# EAGLE board vm_mini_main3a (EAGLE 6.4), part 1 of 2
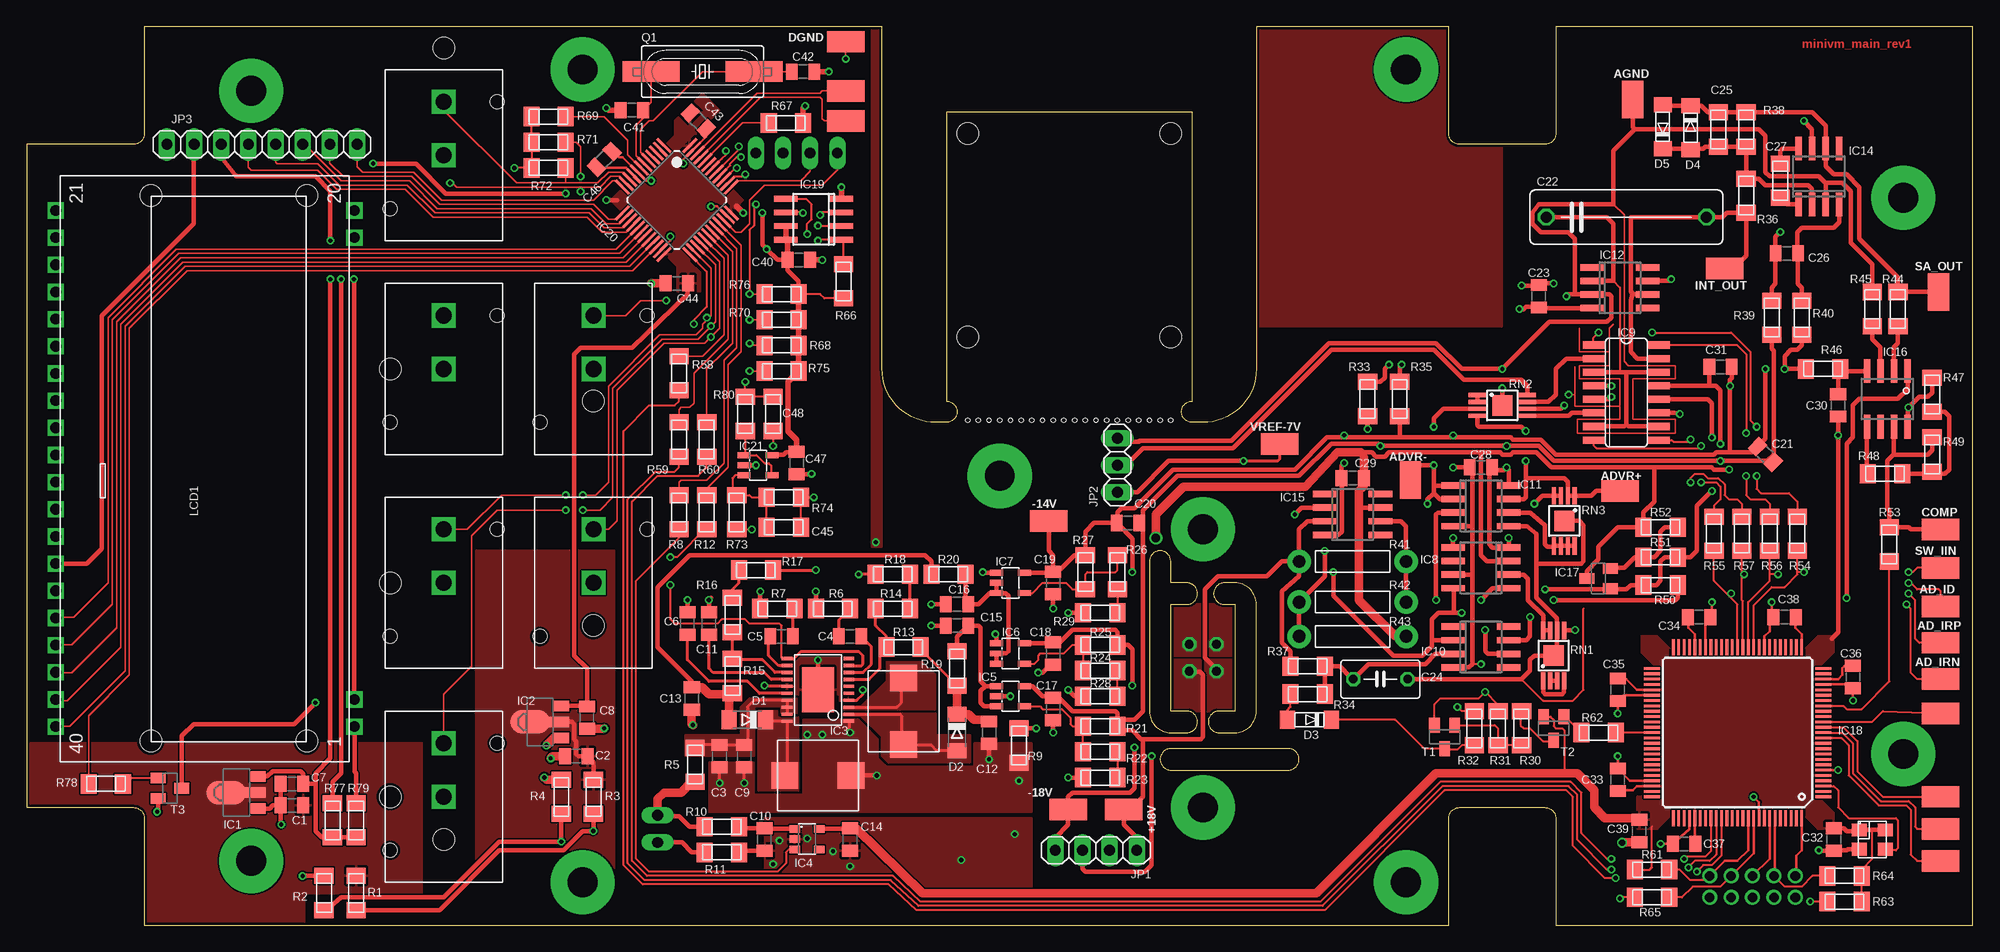
[diagram p0: board, top side]
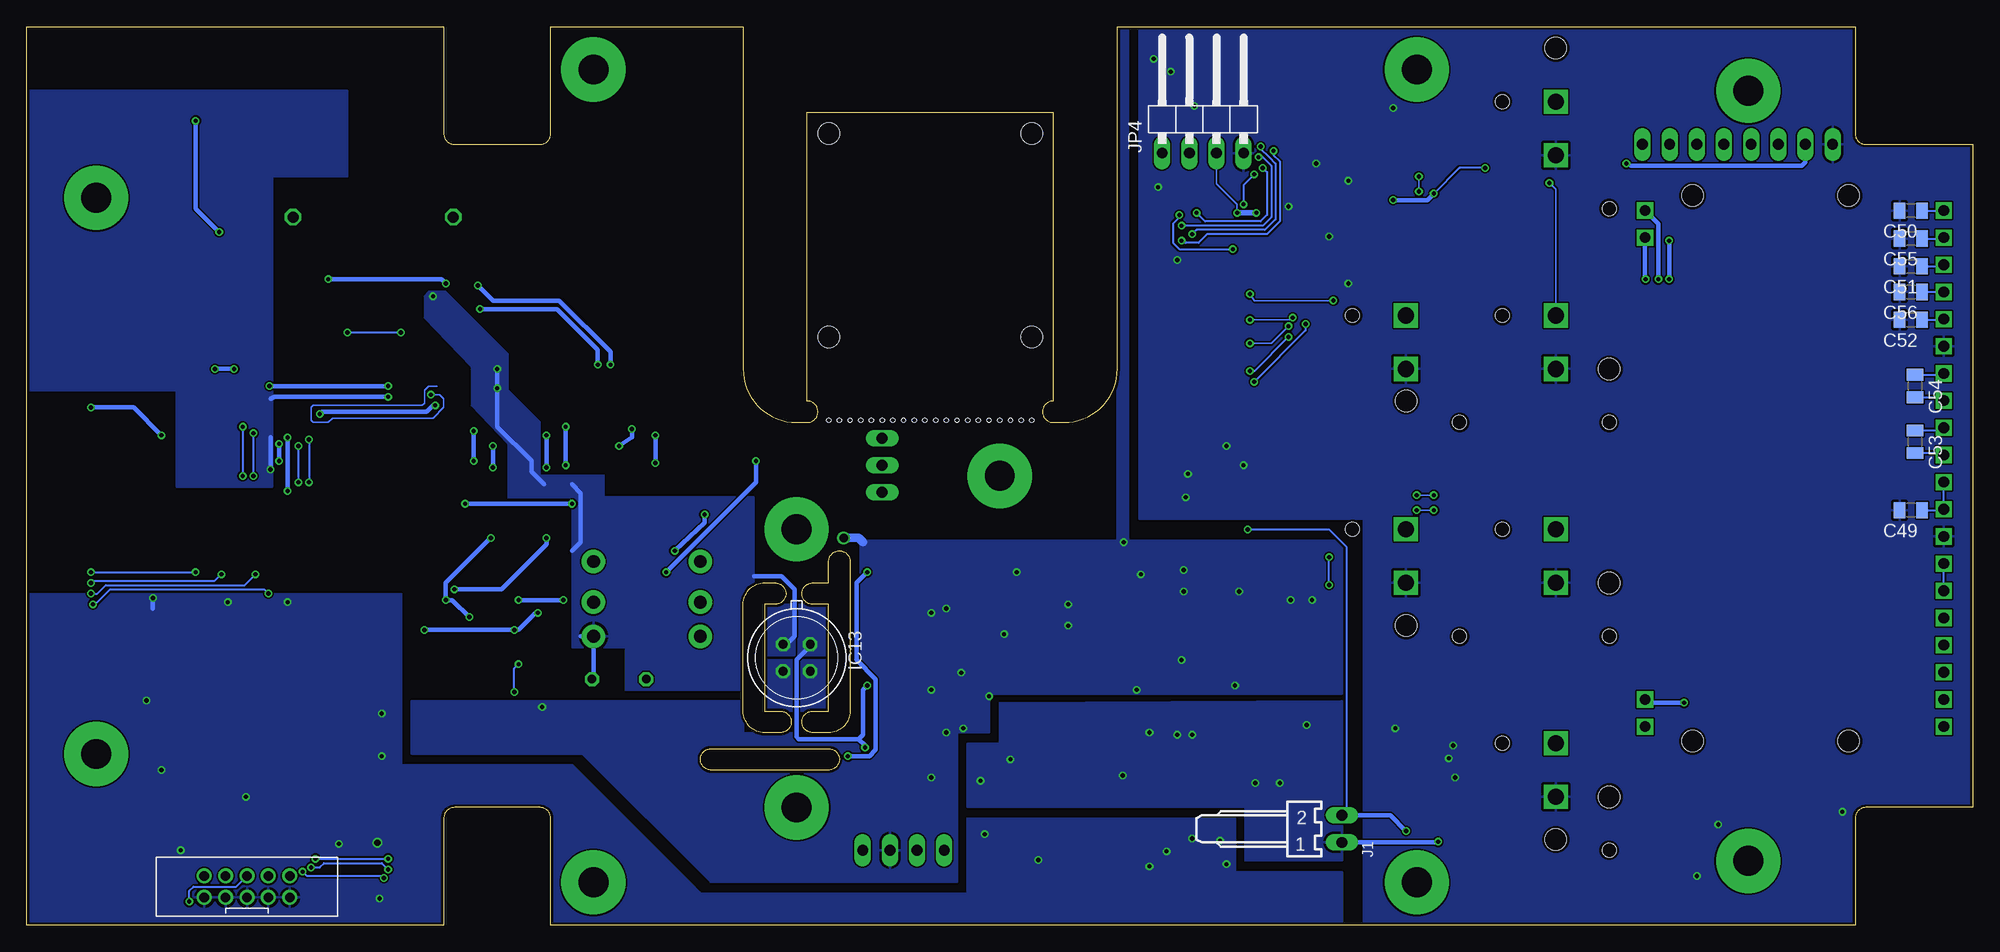
[diagram p1: board, bottom side, seen from below]

Size 182 x 84 mm. Coordinates in mm from the lower left corner, seen from the top.
Outline: 0,11 10,11 arc-90 11,10 11,0 133,0 133,10 arc-90 134,11 142,11 arc-90 143,10 143,0 182,0 182,84 143,84 143,74 arc-90 142,73 134,73 arc-90 133,74 133,84 115,84 115,52 arc-90 110,47 109,47 arc-90 108,48 arc-90 109,49 109,76 86,76 86,49 arc-90 87,48 arc-90 86,47 85,47 arc-90 80,52 80,84 11,84 11,74 arc-90 10,73 0,73 0,11
Outline: 105,34 105,20 arc90 107,18 108.5,18 arc90 109.5,19 arc90 108.5,20 107,20 107,30 108.5,30 arc90 109.5,31 arc90 108.5,32 107,32 107,34 arc90 106,35 arc90 105,34
Outline: 111.5,20 arc90 110.5,19 arc90 111.5,18 113,18 arc90 115,20 115,30 arc90 113,32 112,32 arc90 111,31 arc90 112,30 113,30 113,20 111.5,20
Outline: 107,16.5 arc90 106,15.5 arc90 107,14.5 118,14.5 arc90 119,15.5 arc90 118,16.5 107,16.5
Copper layers (1*16): Top 0.035mm / dielectric 1.5mm / Bottom 0.035mm
Design rules "Fusion_eagle_rule_v1.1": minimum track width 6mil, minimum drill 0.3mm, track to track 6mil, track to pad 6mil, pad to pad 6mil, via to via 6mil, smd to smd 0mil, copper to edge 10mil, drill to drill 10mil, minimum pad ring 10mil, minimum via ring 6mil, stop-mask expansion 2mil, vias tented up to drill 100mil, thermal gap 10mil
Holes 2 mm at 11.6,17.2 26.2,17.2 26.2,68.2 11.6,68.2 39,8 39,82 53,28 53,49 34,52 34,32 34,12 88,74 88,55 107,55 107,74
Holes 0.4 mm at 88,47.2 107,47.2 89,47.2 90,47.2 91,47.2 92,47.2 93,47.2 94,47.2 95,47.2 96,47.2 97,47.2 98,47.2 100,47.2 99,47.2 101,47.2 102,47.2 103,47.2 104,47.2 105,47.2 106,47.2

## Footprints (pad centres in the part's own frame; a part is rotated, then mirrored left to right if it is on the bottom)
R0805 = smd 1.1 x 1.5: 1 -1.05,0; 2 1.05,0
C150-054X183 = drill 1.016 octagon: 1 -7.493,0; 2 7.493,0
C050-035X075 = drill 0.813 octagon: 1 -2.54,0; 2 2.54,0
R_MINIMELF = smd 1.5 x 1.8: P$1 -1.6,0; P$2 1.6,0
IDC_20_10P = drill 0.9: 1 -4,1; 2 -4,-1; 3 -2,1; 4 -2,-1; 5 0,1; 6 0,-1; 7 2,1; 8 2,-1; 9 4,1; 10 4,-1
MINIMELF = smd 1.4 x 1.8: A 1.7,0; C -1.7,0
SOD-80 = smd 1.397 x 1.702: A 1.905,0; K -2.223,0
SOT89 = smd 1 x 1.5: 1 -1.499,-1.981; 3 1.499,-1.981 | smd 1 x 2: 2 0,-1.727 | smd 2.2 x 3.7: 2@1 0,0.94
TSSOP20-EP = smd 0.305 x 0.991: 1 -2.925,-2.9; 2 -2.275,-2.9; 3 -1.625,-2.9; 4 -0.975,-2.9; 5 -0.325,-2.9; 6 0.325,-2.9; 7 0.975,-2.9; 8 1.625,-2.9; 9 2.275,-2.9; 10 2.925,-2.9 | smd 0.3 x 1: 11 2.925,2.9; 12 2.275,2.9; 13 1.625,2.9; 14 0.975,2.9; 15 0.325,2.9; 16 -0.325,2.9; 17 -0.975,2.9; 18 -1.625,2.9; 19 -2.275,2.9; 20 -2.925,2.9 | smd 4.2 x 3: EP 0,0
SOT23-5 = smd 0.7 x 1: 1 -0.99,-1.17; 2 -0.04,-1.17; 3 0.91,-1.17; 4 0.91,1.13; 5 -0.99,1.13
SOT23-5L = smd 0.55 x 1.2: 1 -0.95,-1.3; 2 0,-1.3; 3 0.95,-1.3; 4 0.95,1.3; 5 -0.95,1.3
SO08 = smd 0.6 x 2.2: 1 -1.905,-2.6; 2 -0.635,-2.6; 3 0.635,-2.6; 4 1.905,-2.6; 5 1.905,2.6; 6 0.635,2.6; 7 -0.635,2.6; 8 -1.905,2.6
SO16 = smd 0.66 x 2.032: 1 -4.445,-3.073; 2 -3.175,-3.073; 3 -1.905,-3.073; 4 -0.635,-3.073; 5 0.635,-3.073; 6 1.905,-3.073; 7 3.175,-3.073; 8 4.445,-3.073; 9 4.445,3.073; 10 3.175,3.073; 11 1.905,3.073; 12 0.635,3.073; 13 -0.635,3.073; 14 -1.905,3.073; 15 -3.175,3.073; 16 -4.445,3.073
TO39/4 = drill 0.813 octagon: 1 -1.27,-1.27; 2 1.27,-1.27; 3 1.27,1.27; 4 -1.27,1.27
SOT23 = smd 1 x 1.4: 1 -0.95,-1.1; 2 0.95,-1.1; 3 0,1.1
TQFP100 = smd 1.5 x 0.25: 1 -8,6; 2 -8,5.5; 3 -8,5; 4 -8,4.5; 5 -8,4; 6 -8,3.5; 7 -8,3; 8 -8,2.5; 9 -8,2; 10 -8,1.5; 11 -8,1; 12 -8,0.5; 13 -8,0; 14 -8,-0.5; 15 -8,-1; 16 -8,-1.5; 17 -8,-2; 18 -8,-2.5; 19 -8,-3; 20 -8,-3.5; 21 -8,-4; 22 -8,-4.5; 23 -8,-5; 24 -8,-5.5; 25 -8,-6; 51 8,-6; 52 8,-5.5; 53 8,-5; 54 8,-4.5; 55 8,-4; 56 8,-3.5; 57 8,-3; 58 8,-2.5; 59 8,-2; 60 8,-1.5; 61 8,-1; 62 8,-0.5; 63 8,0; 64 8,0.5; 65 8,1; 66 8,1.5; 67 8,2; 68 8,2.5; 69 8,3; 70 8,3.5; 71 8,4; 72 8,4.5; 73 8,5; 74 8,5.5; 75 8,6 | smd 0.25 x 1.5: 26 -6,-8; 27 -5.5,-8; 28 -5,-8; 29 -4.5,-8; 30 -4,-8; 31 -3.5,-8; 32 -3,-8; 33 -2.5,-8; 34 -2,-8; 35 -1.5,-8; 36 -1,-8; 37 -0.5,-8; 38 0,-8; 39 0.5,-8; 40 1,-8; 41 1.5,-8; 42 2,-8; 43 2.5,-8; 44 3,-8; 45 3.5,-8; 46 4,-8; 47 4.5,-8; 48 5,-8; 49 5.5,-8; 50 6,-8; 76 6,8; 77 5.5,8; 78 5,8; 79 4.5,8; 80 4,8; 81 3.5,8; 82 3,8; 83 2.5,8; 84 2,8; 85 1.5,8; 86 1,8; 87 0.5,8; 88 0,8; 89 -0.5,8; 90 -1,8; 91 -1.5,8; 92 -2,8; 93 -2.5,8; 94 -3,8; 95 -3.5,8; 96 -4,8; 97 -4.5,8; 98 -5,8; 99 -5.5,8; 100 -6,8
SO-08 = smd 0.55 x 2.2: 1 -1.905,-2.6; 2 -0.635,-2.6; 3 0.635,-2.6; 4 1.905,-2.6; 5 1.905,2.6; 6 0.635,2.6; 7 -0.635,2.6; 8 -1.905,2.6
LQFP48 = smd 1.8 x 0.25: 1 -4.45,2.75; 2 -4.45,2.25; 3 -4.45,1.75; 4 -4.45,1.25; 5 -4.45,0.75; 6 -4.45,0.25; 7 -4.45,-0.25; 8 -4.45,-0.75; 9 -4.45,-1.25; 10 -4.45,-1.75; 11 -4.45,-2.25; 12 -4.45,-2.75; 25 4.45,-2.75; 26 4.45,-2.25; 27 4.45,-1.75; 28 4.45,-1.25; 29 4.45,-0.75; 30 4.45,-0.25; 31 4.45,0.25; 32 4.45,0.75; 33 4.45,1.25; 34 4.45,1.75; 35 4.45,2.25; 36 4.45,2.75 | smd 0.25 x 1.8: 13 -2.75,-4.45; 14 -2.25,-4.45; 15 -1.75,-4.45; 16 -1.25,-4.45; 17 -0.75,-4.45; 18 -0.25,-4.45; 19 0.25,-4.45; 20 0.75,-4.45; 21 1.25,-4.45; 22 1.75,-4.45; 23 2.25,-4.45; 24 2.75,-4.45; 37 2.75,4.45; 38 2.25,4.45; 39 1.75,4.45; 40 1.25,4.45; 41 0.75,4.45; 42 0.25,4.45; 43 -0.25,4.45; 44 -0.75,4.45; 45 -1.25,4.45; 46 -1.75,4.45; 47 -2.25,4.45; 48 -2.75,4.45
7395-02 = drill 1.016 long: 1 1.27,0; 2 -1.27,0
1X04 = drill 1.016 long: 1 -3.81,0; 2 -1.27,0; 3 1.27,0; 4 3.81,0
1X03 = drill 1.016 long: 1 -2.54,0; 2 0,0; 3 2.54,0
1X08 = drill 1.016 long: 1 -8.89,0; 2 -6.35,0; 3 -3.81,0; 4 -1.27,0; 5 1.27,0; 6 3.81,0; 7 6.35,0; 8 8.89,0
1X04/90 = drill 1.016 long: 1 -3.81,-3.81; 2 -1.27,-3.81; 3 1.27,-3.81; 4 3.81,-3.81
SWITCH_6450 = drill 1.5 square: P$1 0,0; P$2 5,0 | hole 1.3: 5,-5; -5,5
BOURNS_SRP7030 = smd 2.5 x 2.5: P$1 3.1,0; P$2 -3.1,0
EADOGM = drill 1 square: 1 -23.44,-13.65; 2 -20.9,-13.65; 19 22.28,-13.65; 20 24.82,-13.65; 21 24.82,14.29; 22 22.28,14.29; 23 19.74,14.29; 24 17.2,14.29; 25 14.66,14.29; 26 12.12,14.29; 27 9.58,14.29; 28 7.04,14.29; 29 4.5,14.29; 30 1.96,14.29; 31 -0.58,14.29; 32 -3.12,14.29; 33 -5.66,14.29; 34 -8.2,14.29; 35 -10.74,14.29; 36 -13.28,14.29; 37 -15.82,14.29; 38 -18.36,14.29; 39 -20.9,14.29; 40 -23.44,14.29
OSC_3225 = smd 1.2 x 1.4: 1 -0.9,-1.2; 2 0.9,-1.2; 3 0.9,1.2; 4 -0.9,1.2
HC49UP = smd 5.334 x 1.93: 1 -4.826,0; 2 4.826,0
R_TR191 = drill 1.2 pad 2.2: P$1 5,0; P$2 -5,0
MSOP8-EP = smd 0.4 x 1.6: 1 -0.975,-2.35; 2 -0.325,-2.35; 3 0.325,-2.35; 4 0.975,-2.35; 5 0.975,2.35; 6 0.325,2.35; 7 -0.325,2.35; 8 -0.975,2.35 | smd 1.9 x 1.9: EP 0,0
TP_SMD_35X2 = smd 3.5 x 2: P$1 0,0

## Placement (x,y rotation side)
C1  1u  [R0805]  24.8,11.2 0 top
C2  1u  [R0805]  51.4,15.8 0 top
C3  100n  [R0805]  64.8,15.8 270 top
C4  47n  [R0805]  77,27 0 top
C5  68n  [R0805]  70.6,27 180 top
C6  1u  [R0805]  61.8,28.2 270 top
C7  1u  [R0805]  24.8,13.2 0 top
C8  1u  [R0805]  52.4,19.4 90 top
C9  100n  [R0805]  67.1,15.8 270 top
C10  1u  [R0805]  69,8 90 top
C11  100n  [R0805]  63.8,28.2 270 top
C12  10u  [R0805]  90,18 270 top
C13  10u  [R0805]  62.2,21.2 90 top
C14  1u  [R0805]  77,8 90 top
C15  1u  [R0805]  87,28 180 top
C16  1u  [R0805]  87,30 180 top
C17  1u  [R0805]  96,20.2 270 top
C18  1u  [R0805]  96,25.4 90 top
C19  1u  [R0805]  96,32 90 top
C20  1u  [R0805]  103,37.6 180 top
C21  1u  [R0805]  162.6,44 135 top
C22  2n2  [C150-054X183]  149.6,66.2 0 top
C23  100n  [R0805]  141.4,58.8 90 top
C24  100n  [C050-035X075]  126.6,23 0 top
C25  33p  [R_MINIMELF]  158.2,74.4 90 top
C26  100n  [R0805]  164.6,62.8 180 top
C27  DNP  [R_MINIMELF]  164,69.6 270 top
C28  100n  [R0805]  136,42.8 0 top
C29  100n  [R0805]  124,41.8 0 top
C30  100n  [R0805]  169.4,48.6 90 top
C31  100n  [R0805]  158.4,52.2 180 top
C32  100n  [R0805]  169,8 90 top
C33  100n  [R0805]  148.8,13.6 270 top
C34  100n  [R0805]  156.4,28.8 180 top
C35  100n  [R0805]  148.8,22 90 top
C36  100n  [R0805]  170.8,23.2 90 top
C37  100n  [R0805]  155,7.6 0 top
C38  100n  [R0805]  164.4,28.8 0 top
C39  10u  [R0805]  150.8,8.8 90 top
C40  100n  [R0805]  72.2,62.2 0 top
C41  33p  [R0805]  56.6,76.2 180 top
C42  33p  [R0805]  72.6,79.8 0 top
C43  100n  [R0805]  62.8,75.2 315 top
C44  100n  [R0805]  60.8,60 180 top
C45  1n8  [R_MINIMELF]  70.8,37.2 0 top
C46  100n  [R0805]  54,71.6 45 top
C47  100n  [R0805]  72,43.2 270 top
C48  1n8  [R_MINIMELF]  69.8,47.8 270 top
C49  1u  [R0805]  5.8,38.8 180 bottom
C50  1u  [R0805]  5.8,66.8 180 bottom
C51  1u  [R0805]  5.8,61.6 180 bottom
C52  1u  [R0805]  5.8,56.6 180 bottom
C53  1u  [R0805]  5.4,45.2 270 bottom
C54  1u  [R0805]  5.4,50.4 270 bottom
C55  1u  [R0805]  5.8,64.2 180 bottom
C56  1u  [R0805]  5.8,59.2 180 bottom
CON1  IDC_10_2MM  [IDC_20_10P]  161.4,3.6 0 bottom
D1  [MINIMELF]  67.4,19.2 180 top
D2  [MINIMELF]  87,18 270 top
D3  BAV103  [SOD-80]  119.8,19.2 180 top
D4  BAV103  [SOD-80]  155.6,74.4 270 top
D5  BAV103  [SOD-80]  153,74.8 90 top
IC1  MCP1703-50\  [SOT89]  19.6,12.4 90 top
IC2  MCP1703-33  [SOT89]  48,19 90 top
IC3  ADP5070  [TSSOP20-EP]  74,22 90 top
IC4  NJM2866F33  [SOT23-5]  73,8 270 top
IC5  ADP7142  [SOT23-5L]  92,21.4 270 top
IC6  ADP7182  [SOT23-5L]  92,25.4 270 top
IC7  ADP7182  [SOT23-5L]  92,32 270 top
IC8  DG419DJD  [SO08]  136,33.4 90 top
IC9  DG211B  [SO16]  149.6,49.8 270 top
IC10  OPA177  [SO08]  136,26 270 top
IC11  OPA2192  [SO08]  136,39.2 270 top
IC12  OPA140  [SO08]  149,59.6 270 top
IC13  LM399H  [TO39/4]  110,25 270 bottom
IC14  OPA192  [SO08]  167.6,70 0 top
IC15  OPA177  [SO08]  124,38.4 270 top
IC16  LM311D  [SO08]  174,49.2 180 top
IC17  TL431_SOT23  [SOT23]  147,32.4 90 top
IC18  MACHXO2-1200-TQ100T100  [TQFP100]  160,18 180 top
IC19  FLASH_SPI  [SO-08]  73.6,66 90 top
IC20  STM32L152XC_LQFP48  [LQFP48]  60.8,67.8 315 top
IC21  MCP6441  [SOT23-5L]  68.4,43 270 top
J1  22-05-7028-02  [7395-02]  59,9 270 bottom
JP1  [1X04]  100,7 180 top
JP2  [1X03]  102,43 90 top
JP3  [1X08]  22,73 180 top
JP4  [1X04/90]  72,76 0 bottom
K1  SWITCH_MINI6450  [SWITCH_6450]  39,12 90 top
K2  SWITCH_MINI6450  [SWITCH_6450]  39,32 90 top
K3  SWITCH_MINI6450  [SWITCH_6450]  39,52 90 top
K4  SWITCH_MINI6450  [SWITCH_6450]  39,72 90 top
K5  SWITCH_MINI6450  [SWITCH_6450]  53,32 90 top
K6  SWITCH_MINI6450  [SWITCH_6450]  53,52 90 top
L1  INDUCTORBOURNS_SRP7030  [BOURNS_SRP7030]  74,14 0 top
L2  INDUCTORBOURNS_SRP7030  [BOURNS_SRP7030]  82,20 90 top
LCD1  EADOGM132-5  [EADOGM]  17,42 90 top
OSC1  OSC3225  [OSC_3225]  172.6,8 270 top
Q1  [HC49UP]  63.2,79.8 0 top
R1  1R8  [R_MINIMELF]  30.8,3 270 top
R2  0R  [R_MINIMELF]  27.8,3 270 top
R3  1R8  [R_MINIMELF]  53,12 270 top
R4  0R  [R_MINIMELF]  50,12 270 top
R5  1R8  [R_MINIMELF]  62.5,15 270 top
R6  12k  [R_MINIMELF]  75.4,29.6 180 top
R7  12k  [R_MINIMELF]  70.2,29.6 180 top
R8  3k9  [R_MINIMELF]  63.6,38.6 90 top
R9  0R  [R_MINIMELF]  92.8,16.8 270 top
R10  1R8  [R_MINIMELF]  65,9.2 180 top
R11  0R  [R_MINIMELF]  65,6.8 180 top
R12  12k  [R_MINIMELF]  61,38.6 270 top
R13  2M4  [R_MINIMELF]  82,26 180 top
R14  62k  [R_MINIMELF]  81,29.6 0 top
R15  2M4  [R_MINIMELF]  66,23.3 270 top
R16  120k  [R_MINIMELF]  66,29 270 top
R17  93k  [R_MINIMELF]  68.2,33.2 180 top
R18  39k  [R_MINIMELF]  81,32.8 180 top
R19  10R  [R_MINIMELF]  87,24 270 top
R20  10R  [R_MINIMELF]  86.2,32.8 180 top
R21  620k  [R_MINIMELF]  100.4,18.6 0 top
R22  39k  [R_MINIMELF]  100.4,16.2 0 top
R23  6k2  [R_MINIMELF]  100.4,13.8 180 top
R24  39k  [R_MINIMELF]  100.4,23.8 0 top
R25  620k  [R_MINIMELF]  100.4,26.2 0 top
R26  47k  [R_MINIMELF]  102,33 270 top
R27  620k  [R_MINIMELF]  99,33 90 top
R28  6k2  [R_MINIMELF]  100.4,21.4 180 top
R29  12k  [R_MINIMELF]  100.4,29.2 180 top
R30  120k  [R_MINIMELF]  139.8,18.4 90 top
R31  620k  [R_MINIMELF]  137.6,18.4 270 top
R32  120k  [R_MINIMELF]  135.4,18.4 90 top
R33  10R  [R_MINIMELF]  125.4,49.2 270 top
R34  12k  [R_MINIMELF]  119.8,21.6 180 top
R35  10R  [R_MINIMELF]  128.4,49.2 270 top
R36  12k  [R_MINIMELF]  160.8,68.2 90 top
R37  62R  [R_MINIMELF]  119.8,24.2 0 top
R38  62k  [R_MINIMELF]  160.8,74.4 90 top
R39  10R  [R_MINIMELF]  163.2,56.8 270 top
R40  10R  [R_MINIMELF]  166,56.8 270 top
R41  3k01  [R_TR191]  124,34 0 top
R42  3k01  [R_TR191]  124,30.2 0 top
R43  6k95  [R_TR191]  124,27 0 top
R44  3k9  [R_MINIMELF]  175,57.6 270 top
R45  620R  [R_MINIMELF]  172.6,57.6 90 top
R46  10R  [R_MINIMELF]  168,52 180 top
R47  62R  [R_MINIMELF]  178.2,49.6 90 top
R48  39k  [R_MINIMELF]  173.8,42.2 0 top
R49  3k9  [R_MINIMELF]  178.2,44 270 top
R50  62k  [R_MINIMELF]  152.8,31.8 180 top
R51  620k  [R_MINIMELF]  152.8,34.4 180 top
R52  240k  [R_MINIMELF]  152.8,37.2 0 top
R53  6k2  [R_MINIMELF]  174.2,35.6 270 top
R54  6k2  [R_MINIMELF]  165.6,36.6 270 top
R55  6k2  [R_MINIMELF]  157.8,36.6 270 top
R56  6k2  [R_MINIMELF]  163,36.6 270 top
R57  6k2  [R_MINIMELF]  160.4,36.6 270 top
R58  6k2  [R_MINIMELF]  61,51.6 90 top
R59  6k2  [R_MINIMELF]  61,45.4 90 top
R60  6k2  [R_MINIMELF]  63.6,45.4 90 top
R61  6k2  [R_MINIMELF]  152,5.2 0 top
R62  6k2  [R_MINIMELF]  147,18 0 top
R63  6k2  [R_MINIMELF]  170,2.2 180 top
R64  6k2  [R_MINIMELF]  170,4.6 180 top
R65  6k2  [R_MINIMELF]  152,2.6 180 top
R66  39k  [R_MINIMELF]  76.4,60.2 90 top
R67  6k2  [R_MINIMELF]  71,75 0 top
R68  6k2  [R_MINIMELF]  70.6,54.2 0 top
R69  6k2  [R_MINIMELF]  48.8,75.6 180 top
R70  6k2  [R_MINIMELF]  70.6,56.6 0 top
R71  6k2  [R_MINIMELF]  48.8,73.2 180 top
R72  6k2  [R_MINIMELF]  48.8,70.8 180 top
R73  6M2  [R_MINIMELF]  66.4,38.6 90 top
R74  2M4  [R_MINIMELF]  70.8,40 0 top
R75  6k2  [R_MINIMELF]  70.6,51.8 0 top
R76  6k2  [R_MINIMELF]  70.6,59 0 top
R77  390R  [R_MINIMELF]  28.6,9.8 270 top
R78  6k2  [R_MINIMELF]  7.4,13.2 180 top
R79  390R  [R_MINIMELF]  30.8,9.8 270 top
R80  620R  [R_MINIMELF]  67.2,47.8 90 top
RN1  LT5400-5k-1k  [MSOP8-EP]  142.8,25.2 0 top
RN2  LT5400-100k-100k  [MSOP8-EP]  138,48.6 270 top
RN3  LT5400-10k+10k  [MSOP8-EP]  143.8,37.8 180 top
T1  BC847  [SOT23]  132.6,17.6 180 top
T2  BC857  [SOT23]  142.8,18.4 180 top
T3  BC847  [SOT23]  13.4,12.8 270 top
TP1  TEST_PADSMD_35X2  [TP_SMD_35X2]  95.6,37.8 0 top
TP2  TEST_PADSMD_35X2  [TP_SMD_35X2]  97.4,10.8 180 top
TP3  TEST_PADSMD_35X2  [TP_SMD_35X2]  102.6,10.8 0 top
TP4  TEST_PADSMD_35X2  [TP_SMD_35X2]  150.2,77.2 90 top
TP5  TEST_PADSMD_35X2  [TP_SMD_35X2]  158.8,61.4 0 top
TP6  TEST_PADSMD_35X2  [TP_SMD_35X2]  178.8,59.2 90 top
TP7  TEST_PADSMD_35X2  [TP_SMD_35X2]  179,37 0 top
TP8  TEST_PADSMD_35X2  [TP_SMD_35X2]  149,40.6 0 top
TP9  TEST_PADSMD_35X2  [TP_SMD_35X2]  129.4,41.6 90 top
TP10  TEST_PADSMD_35X2  [TP_SMD_35X2]  179,33.4 0 top
TP11  TEST_PADSMD_35X2  [TP_SMD_35X2]  179,26.4 0 top
TP12  TEST_PADSMD_35X2  [TP_SMD_35X2]  179,23 0 top
TP13  TEST_PADSMD_35X2  [TP_SMD_35X2]  179,29.8 0 top
TP14  TEST_PADSMD_35X2  [TP_SMD_35X2]  179,6 180 top
TP15  TEST_PADSMD_35X2  [TP_SMD_35X2]  179,9 180 top
TP16  TEST_PADSMD_35X2  [TP_SMD_35X2]  179,12 0 top
TP17  TEST_PADSMD_35X2  [TP_SMD_35X2]  179,19.8 180 top
TP18  TEST_PADSMD_35X2  [TP_SMD_35X2]  76.6,75.2 0 top
TP19  TEST_PADSMD_35X2  [TP_SMD_35X2]  76.6,78 0 top
TP20  TEST_PADSMD_35X2  [TP_SMD_35X2]  76.6,82.6 0 top
TP21  TEST_PADSMD_35X2  [TP_SMD_35X2]  117.2,45 0 top

## Library data of the parts
C1-C21 C23 C25-C56 IC4 K1-K6 R1-R80 = _moja
C22 C24 = _rcl
CON1 OSC1 = _mcs1a
D1 D2 = diode
D3-D5 IC1-IC3 IC5-IC7 IC17 IC19 IC21 LCD1 RN1-RN3 T1-T3 = _mcom6
IC8-IC12 IC14 IC15 = linear
IC13 IC16 = _linear
IC18 IC20 = _jl4
J1 = con-molex; OC_FARNELL: 9731601; OC_NEWARK: unknown
JP1-JP4 = pinhead-2
L1 L2 = _mcs1
Q1 = crystal
TP1-TP21 = _moja_e

## Nets
0V: C3.2 C9.2 C12.2 C13.1 IC3.1 J1.1 L1.P$1 R2.P$2 R4.P$2 R9.P$2 R11.P$2
+3V3: C14.2 C30.1 C32.2 C33.2 C34.2 C35.2 C36.2 C37.2 C38.2 C39.2 CON1.1 IC4.5 IC16.8 IC18.5 IC18.11 IC18.23 IC18.26 IC18.46 IC18.50 IC18.55 IC18.73 IC18.80 IC18.93 IC18.100 OSC1.1 OSC1.4 R47.P$2 R61.P$1 R63.P$1 R64.P$1 T2.2
+5V: C7.2 IC1.3 JP3.6 R77.P$2 R79.P$2
+18V: C17.1 C20.1 C21.1 C28.2 C31.2 IC5.5 IC8.4 IC9.13 IC10.7 IC11.8 IC13.3 JP1.1 R21.P$2 R33.P$2 R39.P$2 R50.P$1 TP3.P$1
+UB: J1.2 R1.P$2 R3.P$2 R5.P$2 R10.P$2 R73.P$1
-14V: C19.2 C20.2 C21.2 C28.1 C29.1 C31.1 IC7.5 IC8.7 IC9.4 IC10.4 IC11.4 IC15.4 JP1.3 R27.P$2 R31.P$1 R35.P$2 R40.P$2 R46.P$2 T1.2 TP1.P$1
-18V: C18.2 IC6.5 IC13.4 JP1.4 R25.P$2 TP2.P$1
AD_C1: IC20.29 R58.P$2
AD_C2: IC20.30 R59.P$2
AD_C3: IC20.31 R60.P$2
AD_COMP: IC16.7 R49.P$1 R53.P$1 TP7.P$1
AD_ID: IC9.16 R56.P$1
AD_IIN: IC9.1 R54.P$1
AD_IN: JP2.2 RN2.8
AD_IRN: IC9.8 R55.P$1
AD_IRP: IC9.9 R57.P$1
AD_REF+: IC11.7 RN2.4 RN3.1 RN3.2 TP8.P$1
AD_REF-: IC11.1 IC11.2 RN2.3 RN3.3 RN3.4 TP9.P$1
AD_RFS: R30.P$2 T2.3
AGND: C6.1 C11.1 C15.2 C16.2 C17.2 C18.1 C19.1 C24.2 C29.2 IC3.4 IC3.15 IC3.EP IC5.2 IC6.1 IC7.1 IC8.3 IC9.5 IC11.5 IC12.3 IC13.1 IC14.3 IC15.7 IC17.3 JP1.2 JP2.3 R6.P$2 R7.P$2 R9.P$1 R17.P$1 R18.P$2 R23.P$2 R28.P$2 R29.P$2 R32.P$2 R43.P$1 R45.P$2 R52.P$1 RN1.6 RN1.EP RN2.EP RN3.EP TP4.P$1
ANA_1: C48.P$1 IC20.25 R80.P$2
D_A0: IC20.19 LCD1.38
D_BK: IC20.22 R78.P$2
D_CLK: IC20.18 LCD1.37
D_CS: IC20.21 LCD1.40
D_RST: IC20.20 LCD1.39
D_SI: IC20.17 LCD1.36
DGND: C10.1 C14.1 C32.1 C33.1 C34.1 C35.1 C36.1 C37.1 C38.1 C39.1 CON1.2 CON1.4 CON1.6 CON1.8 CON1.10 IC4.2 IC16.1 IC18.6 IC18.22 IC18.33 IC18.44 IC18.56 IC18.72 IC18.79 IC18.92 OSC1.2 R11.P$1 R65.P$2
EX_D1: IC20.14 JP3.3
EX_D2: IC20.15 JP3.4
EX_D3: IC20.16 JP3.5
EX_RX: IC20.13 JP3.2
EX_TX: IC20.12 JP3.1
GND: C1.1 C2.1 C7.1 C8.1 C40.2 C41.2 C42.2 C43.2 C44.2 C45.P$2 C46.2 C47.2 C48.P$2 C49.2 C50.2 C51.2 C52.2 C55.2 C56.2 IC1.1 IC2.1 IC19.4 IC20.8 IC20.23 IC20.35 IC20.47 IC21.2 JP3.8 JP4.4 K1.P$1 K2.P$1 K3.P$1 K4.P$1 K5.P$1 K6.P$1 LCD1.26 LCD1.33 R2.P$1 R4.P$1 R67.P$2 R74.P$2 T3.2 TP20.P$1
K1: IC20.27 K1.P$2 R68.P$1
K2: IC20.26 K2.P$2 R70.P$1
K3: IC20.11 K3.P$2 R71.P$1
K4: IC20.10 K4.P$2 R72.P$1
K5: IC20.28 K5.P$2 R75.P$1
K6: IC20.38 K6.P$2 R76.P$1
N$10: LCD1.1 R79.P$1
N$11: LCD1.20 R77.P$1
N$12: LCD1.2 LCD1.19 T3.3
N$13: R78.P$1 T3.1
N$14: C50.1 LCD1.21
N$15: C22.1 IC9.3 IC9.7 IC9.10 IC9.14 IC12.2
N$16: IC18.3 OSC1.3
N$17: IC15.2 R42.P$2 R43.P$2
N$18: IC9.2 RN2.7
N$19: C22.2 IC9.15 IC12.6 R36.P$1 TP5.P$1
N$20: C55.1 LCD1.22
N$21: C51.1 LCD1.23
N$22: IC3.9 IC3.11 R8.P$1
N$23: IC4.3 R12.P$2
N$24: R24.P$2 R28.P$1
N$25: IC9.11 RN2.6
N$26: IC9.6 RN2.5
N$27: C23.2 IC12.7 R33.P$1
N$28: C23.1 IC12.4 R35.P$1
N$29: IC8.1 IC11.3
N$30: RN1.1 RN1.4
N$31: C56.1 LCD1.24
N$32: C16.1 IC6.2 IC6.3 IC7.2 IC7.3 R20.P$1
N$33: C15.1 IC5.1 IC5.3 R19.P$1
N$34: C52.1 LCD1.25
N$35: C53.1 LCD1.29
N$36: C53.2 LCD1.30
N$37: R62.P$1 T2.1
N$38: D3.A R34.P$2
N$39: C54.2 LCD1.28
N$40: C54.1 LCD1.27
N$41: C49.1 LCD1.31 LCD1.32
N$42: IC18.35 R54.P$2 TP10.P$1
N$43: CON1.9 IC18.90 R61.P$2
N$44: CON1.7 IC18.91 R65.P$1
N$45: IC8.2 RN1.7 RN1.8
N$46: CON1.5 IC18.94 R63.P$2
N$47: CON1.3 IC18.95 R64.P$2
N$48: IC3.3 L2.P$1
N$49: D1.C IC3.20 L1.P$2
N$50: D2.A IC3.2 L2.P$2
N$51: C3.1 C9.1 IC3.17 IC3.18 IC3.19 R5.P$1
N$52: IC5.4 R21.P$1 R22.P$1
N$53: C11.2 IC3.14
N$54: IC13.2 IC15.3 R37.P$1 R41.P$2
N$55: IC18.84 R59.P$1
N$56: C25.P$1 D4.A D5.K IC14.2 R36.P$2 R38.P$1
N$57: C12.1 D2.C R13.P$1 R19.P$2
N$58: C4.1 R6.P$1
N$59: IC3.13 R15.P$1 R16.P$2
N$60: C5.1 R7.P$1
N$61: IC3.7 R13.P$2 R14.P$1
N$62: IC6.4 R24.P$1 R25.P$1
N$63: R30.P$1 R31.P$2 T1.1
N$64: D3.K R32.P$1 T1.3
N$65: RN2.1 RN2.2
N$66: IC11.6 RN3.5 RN3.6 RN3.7 RN3.8
N$67: RN1.2 RN1.3
N$68: C4.2 IC3.8
N$69: C5.2 IC3.12
N$70: C6.2 IC3.16
N$71: C13.2 D1.A R15.P$2 R20.P$2
N$72: C10.2 IC4.1 R10.P$1
N$73: IC18.36 R56.P$2 TP13.P$1
N$74: C2.2 IC2.2 IC2.2@1 R3.P$1
N$75: IC18.83 R60.P$1
N$76: IC18.37 R57.P$2 TP11.P$1
N$77: C1.2 IC1.2 IC1.2@1 R1.P$1
N$78: IC7.4 R26.P$1 R27.P$1
N$79: C26.2 IC14.7 R39.P$1
N$80: C26.1 IC14.4 R40.P$1
N$81: C25.P$2 D4.K D5.A IC14.6 R38.P$2 R44.P$1 TP6.P$1
N$82: IC18.38 R55.P$2 TP12.P$1
N$83: IC18.18 R53.P$2
N$84: IC16.5 R48.P$1
N$85: R47.P$1 R48.P$2 R49.P$2
N$86: R22.P$2 R23.P$1
N$87: C30.2 IC16.4 R46.P$1
N$88: IC16.2 R44.P$2
N$89: IC16.3 R45.P$1
N$90: IC17.2 R51.P$2 R52.P$2
N$91: IC8.5 IC9.12 IC17.1 R50.P$2 R51.P$1
N$92: IC18.63 R62.P$2
N$95: R26.P$2 R29.P$1
N$96: IC18.85 R58.P$1
N$97: IC20.34 JP4.1
N$98: IC20.37 JP4.2
N$99: C41.1 IC20.6 Q1.1
N$100: C42.1 IC20.5 Q1.2
N$101: IC20.44 R67.P$1
N$102: IC20.7 R69.P$1
N$103: IC18.12 TP14.P$1
N$104: IC18.13 TP15.P$1
N$105: IC18.14 TP16.P$1
N$106: IC18.15 TP17.P$1
N$107: C45.P$1 IC21.3 R73.P$2 R74.P$1
N$108: IC19.6 IC20.39
N$109: IC21.1 IC21.4 R80.P$1
N$110: IC19.2 IC20.40
N$111: IC19.5 IC20.41
N$112: IC19.1 IC20.42 R66.P$2
N$113: IC20.45 TP18.P$1
N$114: IC20.46 TP19.P$1
N$115: C27.P$1 IC14.8
N$116: C27.P$2 IC14.1
N$117: R16.P$1 R17.P$2
N$118: R14.P$2 R18.P$1
PWR_A_EN: IC20.33 R8.P$2
PWR_D_EN: IC20.32 R12.P$1
SW_VRH: IC8.6
VDD: C8.2 C40.1 C43.1 C44.1 C46.1 C47.1 IC2.3 IC19.3 IC19.7 IC19.8 IC20.9 IC20.24 IC20.36 IC20.48 IC21.5 JP3.7 JP4.3 LCD1.34 LCD1.35 R66.P$1 R68.P$2 R69.P$2 R70.P$2 R71.P$2 R72.P$2 R75.P$2 R76.P$2
VR_-7V: IC8.8 IC10.2 IC10.6 JP2.1 RN1.5 TP21.P$1
VR_-7V_UB: C24.1 IC10.3 R34.P$1 R37.P$2
VR_-10V: IC15.6 R41.P$1 R42.P$1